# Altium PCB ESC10_REV2.PcbDoc
Units mil, origin at the board's own origin, x right, y up, seen from the top; angles counter-clockwise.
Board outline 3790.84 x 1700 mil, 2 copper layers (Top Layer, Bottom Layer); 138 components, 92 nets, 434 pads, 170 vias.
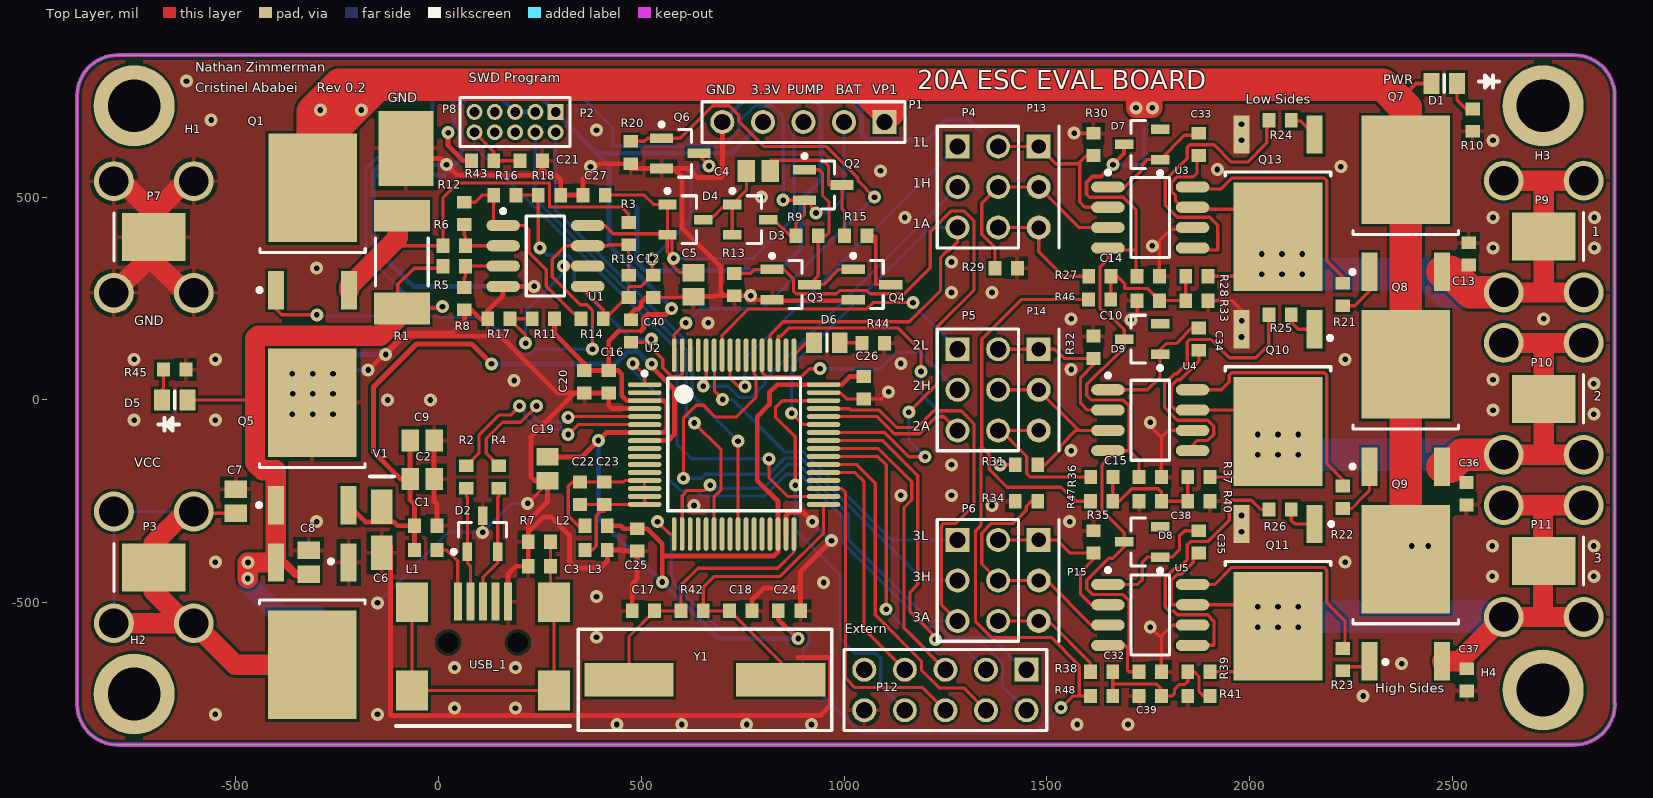
[diagram p0: Top Layer view]
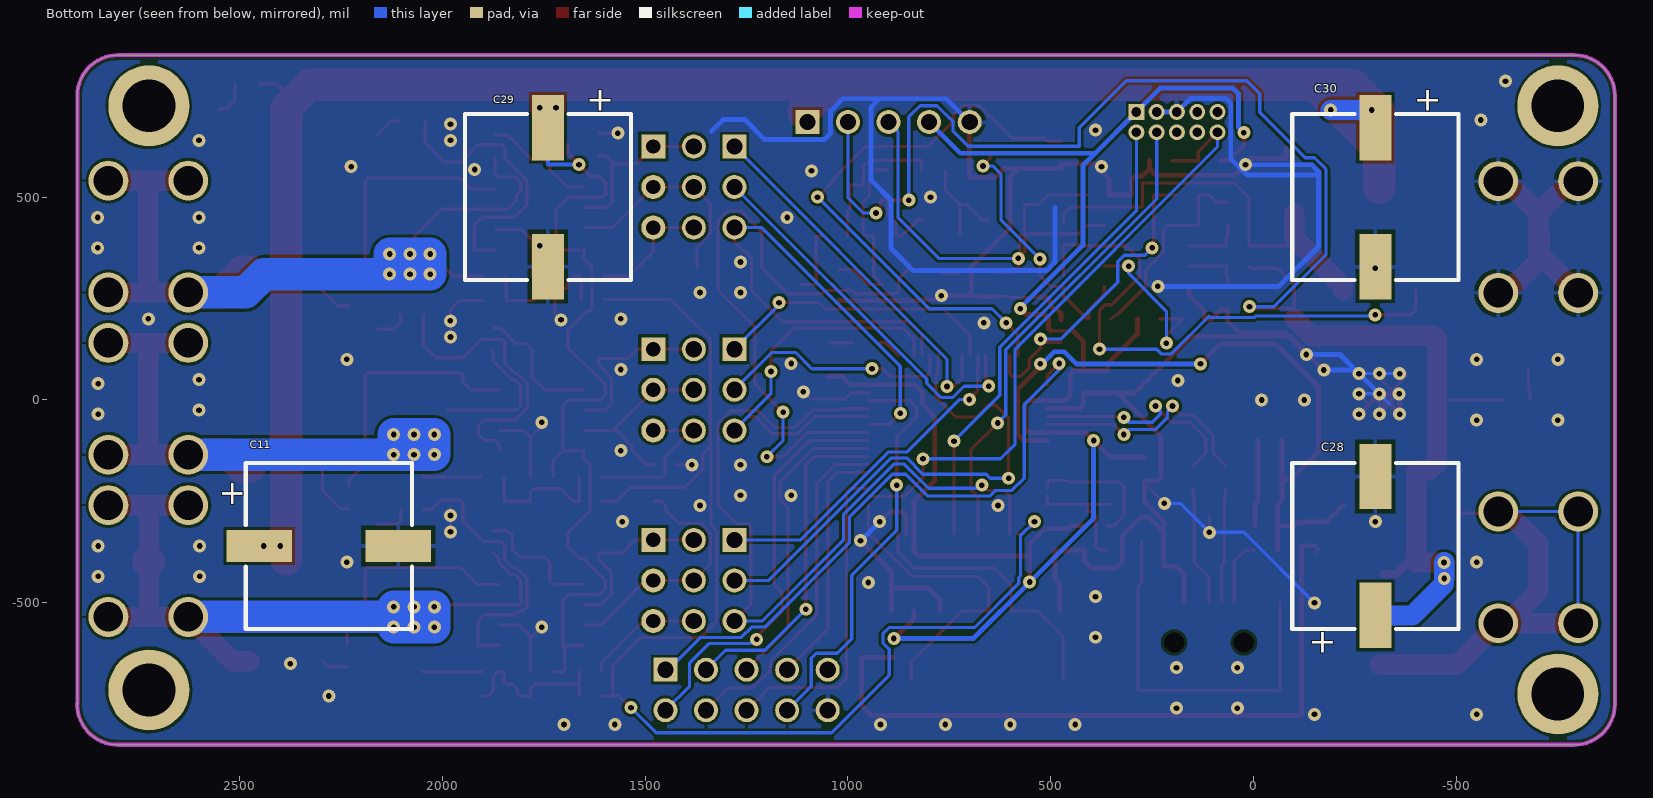
[diagram p1: Bottom Layer view, seen from below]

## Layer stack, top to bottom
Top Solder: solder mask 0.4, Solder Resist, Dk 3.5
Top Layer: signal copper 1.4
Dielectric1: dielectric 12.6, FR-4, Dk 4.8
Bottom Layer: signal copper 1.4
Bottom Solder: solder mask 0.4, Solder Resist, Dk 3.5

## Board outline
-790.5,-850 cw(c-790.5,-750) -890.5,-750 -890.5,750 cw(c-790.5,750) -790.5,850 2800.02,850 cw(c2800.02,750) 2900.02,750 2900,750 2900,-750 2900.34,-750 cw(c2800.34,-750) 2800.34,-850

## Design rules (kind name [scope] priority, off if disabled: settings)
AssemblyTestPointUsage [All] p1 off:
AssemblyTestpoint [All] p1 off: testpointundercomponent=TRUE minsize=40 maxsize=100 preferedsize=60 minholesize=0 maxholesize=40 preferedholesize=32 testpointgrid=1 usegrid=TRUE gridtolerance=0.01 allowsidetop=TRUE allowsidebottom=TRUE
Clearance [All] p1: gap=7
DiffPairsRouting [All] p1: maxlimit=200 minlimit=10 mostfreqgap=10 toplayer_minwidth=8 toplayer_maxwidth=15 toplayer_prefwidth=15 bottomlayer_minwidth=8 bottomlayer_maxwidth=15 bottomlayer_prefwidth=15 maxuncoupledlength=1000
FabricationTestPointUsage [All] p1 off: valid=0 allowmultiple=FALSE
FabricationTestpoint [All] p1 off: side=3 testpointundercomponent=TRUE minsize=40 maxsize=100 preferedsize=60 minholesize=0 maxholesize=40 preferedholesize=32 testpointgrid=1 allowsidetop=TRUE allowsidebottom=TRUE usegrid=TRUE gridtolerance=0.01
HoleSize [All] p1: absolutevalues=TRUE maxlimit=250 minlimit=1 maxpercent=80.000 minpercent=20.000
HoleToHoleClearance [All] p1: gap=12 allowstackedmicrovias=FALSE
MinimumSolderMaskSliver [All] p1: minsoldermaskwidth=6
PasteMaskExpansion [All] p1: expansion=-2
PlaneConnect [All] p1: planeconnectstyle=Relief reliefexpansion=20 reliefentries=4 reliefconductorwidth=20 reliefairgap=10
PolygonConnect PolygonConnect_1 [(InComponent('Q10') OR InComponent('Q11') OR InComponent('Q12')OR InComponent('Q13')OR InComponent('Q14')OR InComponent('Q15'))] p1: connectstyle=Direct reliefconductorwidth=10 reliefentries=4 polygonreliefangle="90 Angle" airgapwidth=10
PolygonConnect PolygonConnect_2 [(InPadClass('All Pads'))] p2: connectstyle=Relief reliefconductorwidth=10 reliefentries=4 polygonreliefangle="90 Angle" airgapwidth=10
PolygonConnect [All] p3: connectstyle=Direct reliefconductorwidth=10 reliefentries=4 polygonreliefangle="90 Angle" airgapwidth=10
RoutingVias [All] p1: holewidth=14 width=32 viastyle="Through Hole" minholewidth=14 minwidth=32 maxholewidth=14 maxwidth=32
SMDEntry [All] p1: side=TRUE corner=FALSE anyangle=FALSE
SilkToSilkClearance [All] p1: silktosilkclearance=4
SilkToSolderMaskClearance SilkscreenOverComponentPads [IsPad] p1: minsilkscreentomaskgap=4 clearancetoexposedcopper=TRUE
SolderMaskExpansion SolderMaskExpansion_1 [InComponent('U2')] p1: expansion=0
SolderMaskExpansion [All] p2: expansion=4
Width Width_3 [InNet('GND')] p1: maxlimit=80 minlimit=6 preferedwidth=12 minimp=50.000000 maximp=50.000000 favimp=50.000000
Width Width_2 [InNet('3.3V')] p2: maxlimit=40 minlimit=6 preferedwidth=12
Width Width_1 [InNet('5V')] p3: maxlimit=40 minlimit=6 preferedwidth=12
Width [All] p4: maxlimit=80 minlimit=8 preferedwidth=8 minimp=50.000000 maximp=50.000000 favimp=50.000000
18 further rules are at their usual default settings.

## Classes and differential pairs
differential pair USB_MCU: +USB_MCU_P -USB_MCU_N
differential pair U: +U_P -U_N

## Components (designator, comment, footprint, x,y, rotation, side; value= is the part's Value field where it differs from the comment)
C1 "0805" 1608[0603] -30.99,-310 r0 top
C2 "0805" C0805 -40,-195 r0 top
C3 "0805" 1608[0603] 249.01,-410 r180 top
C4 "0805" C0805 789.01,564.49 r0 top
C5 "0805" C0805 629.01,284.49 r270 top
C6 "Cap Pol1" 1206_C -140,-320 r270 top
C7 "Cap" C0805 -500,-250 r270 top
C8 "Cap" C0805 -320,-400 r270 top
C9 "Cap" C0805 -40,-100 r180 top
C10 "0805" 1608[0603] 1750,245 r0 top
C11 "Cap Pol1" EEE-FPV391UAP 2280,-360 r90 bottom
C12 "0805" 1608[0603] 530,280 r90 top
C13 "0805" 1608[0603] 2540,360 r270 top
C14 "0805" 1608[0603] 1750,305 r180 top
C15 "0805" 1608[0603] 1755,-190 r180 top
C16 "0805" 1608[0603] 420,45 r90 top
C17 "0805" 1608[0603] 505.55,-520 r0 top
C18 "0805" 1608[0603] 745.55,-520 r180 top
C19 "0805" C0805 269.01,-170 r270 top
C20 "0805" 1608[0603] 360,45 r270 top
C21 "0805" 1608[0603] 229.01,590 r180 top
C22 "0805" 1608[0603] 349.01,-230 r90 top
C23 "0805" 1608[0603] 409.01,-230 r90 top
C24 "0805" 1608[0603] 865.55,-520 r180 top
C25 "0805" 1608[0603] 490,-345 r90 top
C26 "0805" 1608[0603] 1049.01,30 r270 top
C27 "0805" 1608[0603] 384.01,505 r0 top
C28 "Cap Pol1" EEE-FPV391UAP -300,-360 r0 bottom
C29 "Cap Pol1" EEE-FPV391UAP 1740,500 r180 bottom
C30 "Cap Pol1" EEE-FPV391UAP -300,500 r180 bottom
C32 "0805" 1608[0603] 1755,-670 r180 top
C33 "0805" 1608[0603] 1875,630 r90 top
C34 "0805" 1608[0603] 1875,150 r90 top
C35 "0805" 1608[0603] 1875,-350 r90 top
C36 "0805" 1608[0603] 2534.61,-231.22 r90 top
C37 "0805" 1608[0603] 2535,-690 r90 top
C38 "0805" 1608[0603] 1755,-250 r0 top
C39 "0805" 1608[0603] 1755,-730 r0 top
C40 "0805" 1608[0603] 475,170 r270 top
D1 "LED3" 6-0805_L 2480,780 r0 top
D2 "Bat54A" SOT-23B_N 109.01,-330 r90 top
D3 "Bat54A" SOT-23B_N 769.01,444.49 r0 top
D4 "Bat54A" SOT-23B_N 609.01,444.49 r0 top
D5 "LED3" 6-0805_L -650,0 r180 top
D6 "LED3" 6-0805_L 958,141 r0 top
D7 "Bat54A" SOT-23B_N 1735,630 r180 top
D8 "Bat54A" SOT-23B_N 1735,-350 r180 top
D9 "Bat54A" SOT-23B_N 1735,150 r180 top
H1 "stand_off" 4-40_screw_hole#1 -750,750 r0 top
H2 "stand_off" 4-40_screw_hole#1 -750,-700 r0 top (schematic designator H1)
H3 "stand_off" 4-40_screw_hole#2 2723.42,725 r0 top
H4 "stand_off" 4-40_screw_hole#2 2723.42,-715 r0 top
L1 "FB" 1608[0603] -30.99,-370 r0 top
L2 "FB" 1608[0603] 389.01,-310 r0 top
L3 "FB" 1608[0603] 389.01,-370 r0 top
P1 "Header 5" HDR1X5 1100,685 r180 top
P2 "Header 5X2" MHDR2X5 289.01,710 r180 top
P3 "Header" 8191_K -800,-275 r0 top
P4 "Header 3X2" HDR2X3 1280,625 r270 top
P5 "Header 3X2" HDR2X3 1280,125 r270 top
P6 "Header 3X2" HDR2X3 1280,-345 r270 top
P7 "Header" 8191_K -800,539.37 r0 top
P8 "GND_CLIP" GND_CLIP -80,620 r270 top
P9 "Header" 8191_K 2823.42,265 r180 top
P10 "Header" 8191_K 2823.42,-135 r180 top
P11 "Header" 8191_K 2823.42,-535 r180 top
P12 "Header 5X2" HDR2X5 1450,-665 r180 top
P13 "Header 3" HDR1X3 1480,625 r270 top
P14 "Header 3" HDR1X3 1480,125 r270 top
P15 "Header 3" HDR1X3 1480,-345 r270 top
Q1 "PMOS-2" TO228P970-3_4AM -310,440 r90 top
Q2 "PMOS-2" SOT-23_M 949.01,530 r0 top
Q3 "2N7002P" SOT-23_M 869.01,284.49 r0 top
Q4 "2N7002P" SOT-23_M 1069.01,284.49 r0 top
Q5 "PMOS-2" TO228P970-3_4AM -310.99,-570 r270 top
Q6 "2N7002P" SOT-23_M 596.57,608 r0 top
Q7 "NMOS-2" TO228P970-3_4AM 2385,485 r90 top
Q8 "NMOS-2" TO228P970-3_4AM 2385,5 r90 top
Q9 "NMOS-2" TO228P970-3_4AM 2385,-475 r90 top
Q10 "NMOS-2" TO228P970-3_4AM 2070,5 r270 top
Q11 "NMOS-2" TO228P970-3_4AM 2070,-475 r270 top
Q13 "NMOS-2" TO228P970-3_4AM 2070,485 r270 top
R1 "Res1" RESC6432AM -90,340 r90 top
R2 "Res1" 1608[0603] 69.01,-190 r90 top
R3 "Res1" 1608[0603] 469.01,410 r270 top
R4 "Res1" 1608[0603] 149.01,-190 r90 top
R5 "Res1" 1608[0603] 39.01,330 r0 top
R6 "Res1" 1608[0603] 39.01,380 r180 top
R7 "Res1" 1608[0603] 249.01,-350 r0 top
R8 "Res1" 1608[0603] 64.01,250 r90 top
R9 "Res1" 1608[0603] 909.01,404.49 r0 top
R10 "Res1" 1608[0603] 2550,690 r270 top
R11 "Res1" 1608[0603] 259.01,200 r180 top
R12 "Res1" 1608[0603] 64.01,460 r270 top
R13 "Res1" 1608[0603] 729.01,284.49 r270 top
R14 "Res1" 1608[0603] 379.01,200 r0 top
R15 "Res1" 1608[0603] 1029.01,404.49 r0 top
R16 "Res1" 1608[0603] 164.01,505 r180 top
R17 "Res1" 1608[0603] 149.01,200 r180 top
R18 "Res1" 1608[0603] 274.01,505 r180 top
R19 "Res1" 1608[0603] 469.01,280 r90 top
R20 "Res1" 1608[0603] 474.57,610 r270 top
R21 "Res1" 1608[0603] 2230,260 r90 top
R22 "Res1" 1608[0603] 2230,-240 r90 top
R23 "Res1" 1608[0603] 2230,-640 r90 top
R24 "Res1" 1608[0603] 2075,690 r180 top
R25 "Res1" 1608[0603] 2075,210 r180 top
R26 "Res1" 1608[0603] 2075,-270 r180 top
R27 "Res1" 1608[0603] 1630.81,305 r180 top
R28 "Res1" 1608[0603] 1870,305 r180 top
R29 "Res1" 1608[0603] 1400,325 r0 top
R30 "Res1" 1608[0603] 1615,630 r90 top
R31 "Res1" 1608[0603] 1450,-160 r180 top
R32 "Res1" 1608[0603] 1615,130 r90 top
R33 "Res1" 1608[0603] 1870,245 r0 top
R34 "Res1" 1608[0603] 1450,-250 r180 top
R35 "Res1" 1608[0603] 1615,-350 r90 top
R36 "Res1" 1608[0603] 1635.81,-190 r180 top
R37 "Res1" 1608[0603] 1875,-190 r180 top
R38 "Res1" 1608[0603] 1635,-670 r180 top
R39 "Res1" 1608[0603] 1875,-670 r180 top
R40 "Res1" 1608[0603] 1875,-250 r0 top
R41 "Res1" 1608[0603] 1875,-730 r180 top
R42 "Res1" 1608[0603] 625.55,-520 r0 top
R43 "Res1" 1608[0603] 109.01,590 r180 top
R44 "Res1" 1608[0603] 1072,140 r0 top
R45 "Res1" 1608[0603] -650,75 r0 top
R46 "Res1" 1608[0603] 1630,247.78 r0 top
R47 "Res1" 1608[0603] 1635,-250 r0 top
R48 "Res1" 1608[0603] 1635,-730 r0 top
U1 "LM358" SOIC127P600-8BM 264.01,355 r0 top
U2 "MKL25Z64VLH4" TSQFP50P1200X1200-64M 729.01,-110 r0 top
U3 "ADP3110A" SOIC127P600-8BM 1755,450 r0 top
U4 "ADP3110A" SOIC127P600-8BM 1755,-50 r0 top
U5 "ADP3110A" SOIC127P600-8BM 1755,-530 r0 top
USB_1 "USB-M2xFxx" USB-M2xFxx 110,-450 r0 top
V1 "MC78M05 5V Reg" TO228P970-3_4AM -310.99,-90 r90 top
Y1 "8MHz" crystal 470,-690 r0 top

## Footprints (in the part's own frame and the unit in brackets; to place one, negate y for a bottom-side part, rotate by r counter-clockwise, add the part's x,y. Pads: shape width x height; smd on the part's side, far side on the other; paste and mask are expansions set on the pad)
4-40_screw_hole#1 [mil] "4-40_screw_hole"
  round 200 hole 130: 1(0,-25)
4-40_screw_hole#2 [mil] "4-40_screw_hole"
  round 200 hole 130: 1(0,0)
6-0805_L [mm] "Chip Resistor, Body 2.0x1.2mm, IPC High Density"
  rect 1x1.3 smd: 1(-0.8,0) 2(0.8,0)
  silkscreen extent 0,-0.55 0,0.55, body extent -1.07,-0.7 1.07,0.7, height 0.7
1206_C [mm] "1206_Cap"
  rect 2.15x1.35 smd: 1(-1.45,0) 2(1.45,0)
  silkscreen extent -3.33,-0.71 -3.33,0.76
1608[0603] [mm] "Chip Capacitor, Body 1.6x0.8mm, IPC High Density"
  rect 0.8x0.9 smd: 1(-0.7,0) 2(0.7,0)
  body extent -0.87,-0.48 0.87,0.48, height 1.3
8191_K [mm]
  round 2.5 hole 1.85: 1(0,-7) 1(0,0) 1(5,-7) 1(5,0)
  rect 4x3 smd: 1(2.5,-3.5)
  silkscreen extent 0,-5 0,-2
C0805 [mm] "Chip Capacitor, Body 2.0x1.3mm, IPC High Density"
  rect 1.1x1.4 smd: 1(-0.75,0) 2(0.75,0)
  body extent -1.1,-0.72 1.1,0.72, height 1.4
crystal [mil]
  rect 220x83 smd: 1(0,0) 2(374,0)
  silkscreen extent -125,-125 500,125, body extent -37,-95 413,95, height 20
EEE-FPV391UAP [mm]
  rect 2x4.1 smd: 1(0,4.35) 2(0,-4.35)
  silkscreen extent -5.2,-5.2 5.2,5.2
GND_CLIP [mil] "Ground clip for a probe"
  rect 185x135 smd: 1(0,0)
HDR1X3 [mm] "Connector; Header; 3 Position"
  rect 1.5x1.5 hole 0.9: 1(0,0)
  round 1.5 hole 0.9: 2(2.54,0) 3(5.08,0)
  silkscreen extent -1.27,1.27 6.35,1.27
HDR1X5 [mm] "Connector; Header; 5 Position"
  rect 1.5x1.5 hole 1.016: 1(0,0)
  round 1.5 hole 1.016: 2(2.54,0) 3(5.08,0) 4(7.62,0) 5(10.16,0)
  silkscreen extent -1.27,-1.27 11.43,1.27
HDR2X3 [mm] "Connector; Header; 3x2 Position"
  rect 1.5x1.5 hole 1.016: 1(0,0)
  round 1.5 hole 1.016: 2(0,2.54) 3(2.54,0) 4(2.54,2.54) 5(5.08,0) 6(5.08,2.54)
  silkscreen extent -1.27,-1.27 6.35,3.81
HDR2X5 [mm] "Connector; Header; 5x2 Position"
  rect 1.5x1.5 hole 1.016: 1(0,0)
  round 1.5 hole 1.016: 2(0,2.54) 3(2.54,0) 4(2.54,2.54) 5(5.08,0) 6(5.08,2.54) 7(7.62,0) 8(7.62,2.54) 9(10.16,0) 10(10.16,2.54)
  silkscreen extent -1.27,-1.27 11.43,3.81
MHDR2X5 [mm] "Connector; Header; 5x2 Position"
  rect 1x1 hole 0.6 mask+0.152: 1(0,0)
  round 1 hole 0.6 mask+0.152: 2(0,1.27) 3(1.27,0) 4(1.27,1.27) 5(2.54,0) 6(2.54,1.27) 7(3.81,0) 8(3.81,1.27) 9(5.08,0) 10(5.08,1.27)
  silkscreen extent -0.9,-0.9 5.98,2.17
RESC6432AM [mm] "Chip Resistor, Body 6.4x3.2mm, IPC Low Density"
  rect 2x3.5 smd: 1(-2.9,0) 2(2.9,0)
  silkscreen extent -1.5,-1.65 1.5,1.65, body extent -3.32,-1.73 3.32,1.73, height 1.1
SOIC127P600-8BM [mm] "SOIC, 8-Leads, Body 4.9x3.9mm, Pitch 1.27mm, IPC Low Density"
  oval 2.1x0.7 smd: 1(-2.65,1.905) 2(-2.65,0.635) 3(-2.65,-0.635) 4(-2.65,-1.905) 5(2.65,-1.905) 6(2.65,-0.635) 7(2.65,0.635) 8(2.65,1.905)
  silkscreen extent -2.77,-2.5 1.2,2.93, body extent -2,-2.5 2,2.5, height 2.59
SOT-23_M [mm] "SOT23, 3-Leads, Body 2.9x1.3mm, Pitch 0.95mm, Lead Span 2.5mm, IPC Low Density"
  rect 1.45x0.6 smd: 1(-1.175,0.95) 2(-1.175,-0.95) 3(1.175,0)
  silkscreen extent -1.3,-1.5 0.7,1.92, body extent -0.7,-1.5 0.7,1.5, height 1.1
SOT-23B_N [mm] "SOT23, 3-Leads, Body 2.9x1.3mm, Pitch 0.95mm, Lead Span 2.4mm, IPC Medium Density"
  rect 1.15x0.6 smd: 1(-1.125,0.95) 2(-1.125,-0.95) 3(1.125,0)
  silkscreen extent -1.25,-1.5 0.7,1.92, body extent -0.7,-1.5 0.7,1.5, height 1.14
TO228P970-3_4AM [mm] "D-PAK, 4-Leads, Body 6.1x6.5mm, Pitch 2.28mm, Lead Span 9.7mm, IPC Low Density"
  rect 2.4x1 smd: 1(-4.3,2.28) 3(-4.3,-2.28)
  rect 6.8x5.55 smd: 4(2.1,0)
  silkscreen extent -4.42,-3.3 -1.7,3.45, body extent -1.95,-3.3 4.25,3.3, height 2.4
TSQFP50P1200X1200-64M [mm] "Thin QFP, 64-Leads, Body 10x10mm, Pitch 0.5mm, IPC Low Density"
  oval 2.1x0.3 smd: 1(-5.6,3.75) 2(-5.6,3.25) 3(-5.6,2.75) 4(-5.6,2.25) 5(-5.6,1.75) 6(-5.6,1.25) 7(-5.6,0.75) 8(-5.6,0.25) 9(-5.6,-0.25) 10(-5.6,-0.75) 11(-5.6,-1.25) 12(-5.6,-1.75) 13(-5.6,-2.25) 14(-5.6,-2.75) 15(-5.6,-3.25) 16(-5.6,-3.75) 33(5.6,-3.75) 34(5.6,-3.25) 35(5.6,-2.75) 36(5.6,-2.25) 37(5.6,-1.75) 38(5.6,-1.25) 39(5.6,-0.75) 40(5.6,-0.25) 41(5.6,0.25) 42(5.6,0.75) 43(5.6,1.25) 44(5.6,1.75) 45(5.6,2.25) 46(5.6,2.75) 47(5.6,3.25) 48(5.6,3.75)
  oval 0.3x2.1 smd: 17(-3.75,-5.6) 18(-3.25,-5.6) 19(-2.75,-5.6) 20(-2.25,-5.6) 21(-1.75,-5.6) 22(-1.25,-5.6) 23(-0.75,-5.6) 24(-0.25,-5.6) 25(0.25,-5.6) 26(0.75,-5.6) 27(1.25,-5.6) 28(1.75,-5.6) 29(2.25,-5.6) 30(2.75,-5.6) 31(3.25,-5.6) 32(3.75,-5.6) 49(3.75,5.6) 50(3.25,5.6) 51(2.75,5.6) 52(2.25,5.6) 53(1.75,5.6) 54(1.25,5.6) 55(0.75,5.6) 56(0.25,5.6) 57(-0.25,5.6) 58(-0.75,5.6) 59(-1.25,5.6) 60(-1.75,5.6) 61(-2.25,5.6) 62(-2.75,5.6) 63(-3.25,5.6) 64(-3.75,5.6)
  silkscreen extent -5.72,-4.15 4.15,4.57, body extent -5,-5 5,5, height 1.6
USB-M2xFxx [mil] "USB Mini B connector SMD"
  rect 20x94 smd mask+6: 1(-62,-47) 2(-31,-47) 3(0,-47) 4(31,-47) 5(62,-47)
  rect 79x98 smd mask+6: 6(-175,-49) 7(-175,-266) 8(175,-266) 9(175,-49)
  round 0 hole 50 unplated mask+25: ""(-86,-148) ""(86,-148)
  silkscreen extent -215,-354 215,-354

## Part data
C1 C2 C3 C4 C5 C10 C12 C13 C14 C15 C16 C17 C18 C19 C20 C21 C22 C23 C24 C25 C26 C27 C32 C33 C34 C35 C36 C37 C38 C39 C40: library part "Cap Semi", "Capacitor (Semiconductor SIM Model)"
C6 C11 C28 C29 C30: "Polarized Capacitor (Radial)"
C7 C8 C9: "Capacitor"
D1 D5 D6: "Typical BLUE SiC LED"
D2 D3 D4 D7 D8 D9: library part Bat45C, "Bat45C"
L1 L2 L3: library part Inductor, "Inductor"
P1: "Header, 5-Pin"
P2 P12: "Header, 5-Pin, Dual row"
P3 P7 P9 P10 P11: library part Header1h1
P4 P5 P6: "Header, 3-Pin, Dual row"
P13 P14 P15: "Header, 3-Pin"
Q1 Q2 Q5: "P-Channel Power MOSFET"
Q7 Q8 Q9 Q10 Q11 Q13: "N-Channel Power MOSFET"
R1 R2 R3 R4 R5 R6 R7 R8 R9 R10 R11 R12 R13 R14 R15 R16 R17 R18 R19 R20 R21 R22 R23 R24 R25 R26 R27 R28 R29 R30 R31 R32 R33 R34 R35 R36 R37 R38 R39 R40 R41 R42 R43 R44 R45 R46 R47 R48: "Resistor"
U1: "LM358 Op Amp"
U2: "MKL25Z64VLH4 MCU"
USB_1: "USB Mini-B for USB-M2xFxx"
V1: library part MCP1702, "MCP1702 5V REG"
Y1: library part XTAL, "Crystal Oscillator"

## Via types
v1: diameter 32, hole 14, Top Layer to Bottom Layer, tented both sides, 137 vias
v2: diameter 32, hole 14, Top Layer to Bottom Layer, tented bottom, 27 vias
v3: diameter 32, hole 14, Top Layer to Bottom Layer, tented top, 4 vias
v4: diameter 32, hole 14, Top Layer to Bottom Layer, 2 vias

## Nets (pads, with @x,y where several pads share a name; then routed paths per layer and width w, separated by ;. In a path a pad name is that pad's centre, name@x,y a point inside that pad or via, vN(x,y) a via of type N, cw(c..) or ccw(c..) an arc to the next point about the centre after c; other vN are vias at no path point)
1A_EXTERN: U2.36
1H_EXTERN: P12.5 U2.40 | length 764.8
  Top Layer w8: U2.40 1085.06,-119.84 1167,-201.79 1167,-246.18 1148,-265.18 1148,-563 P12.5
1L_EXTERN: P12.3 U2.39 | length 826.7
  Top Layer w8: U2.39 1083.53,-139.53 1104,-160 v1(1104,-516)
  Bottom Layer w8: v1(1104,-516) 1205,-617 1302,-617 P12.3
2A_EXTERN: P12.7 U2.37 | length 614.6
  Top Layer w8: U2.37 1026.98,-178.9 1049,-200.91 1049,-564 P12.7
2H_EXTERN: P12.2 U2.41 | length 1036.2
  Top Layer w8: U2.41 1095.37,-100.16 1182,-186.79 1182,-454.82 1163,-473.82 1163,-522 1225,-584 v1(1225,-590)
  Bottom Layer w8: v1(1225,-590) 1231,-590 1241.53,-600.53 1342.84,-600.53 1390.53,-648.21 1390.53,-705.53 P12.2
2L_EXTERN: P12.9
3.3V: C16.2 C19.1 C20.1 C24.2 C25.2 C26.1 L2.2 P1.4 P2.1 R11.1 R43.2 U2.3 U2.7 U2.30 U2.48 | length 4742.9
  Top Layer w8: 445,170 499.29,170
  Top Layer w12: v1(24,659) 24,627 61,590 R43.2 ; C19.1 354,-140.47 v1(394.47,-100) 414,-80.47 U2.7 555,-80.47 563,-72.47 563,-9.73 555,-1.73 U2.3 464.73,-1.73 452,11 452,63.56 443,72.56 C16.2 ; R11.1 286.57,163 360,89.57 C20.1 C16.2 ; L2.2 449,-310 456.44,-317.44 C25.2 515,-317.44 552,-354.44 552,-385 ; 445,170 420,145 C16.2 ; 499.29,170 505.72,176.43 505.72,200.72 516,211 561,211 v1@569,219 ; v1(552,-449) 552,-385 ; v1(575,225) v1@579,225 ; C24.2 837.99,-541.98 ; v1(887,-588) 851.85,-554.99 ; C26.1 1013.99,57.56 994.07,37.64 U2.48 835,37.64 816,18.64 816,-11 786,-41 786,-198.72 837.28,-250 U2.30 837.28,-374.72 827,-385 552,-385 ; 837.99,-541.98 851.85,-554.99 ; 837.99,-541.98 851,-554.99 851.85,-554.99
  Bottom Layer w12: v1(24,659) 37.33,672.33 37.33,755.1 51,768.77 230.24,768.77 P2.1 390.76,608.26 ; v1(394.47,-100) 394.47,-291.47 v1(552,-449) 691,-588 v1(887,-588) ; v1(575,225) 575,227.13 421,381.13 421,578.01 390.76,608.26 ; P1.4 723.26,608.26 390.76,608.26
3A_EXTERN: P12.4 U2.38 | length 854.7
  Top Layer w8: U2.38 1031.21,-159.21 1077,-205 1077,-530 1191,-644 1191,-666 1235,-710 1295,-710 P12.4
3H_EXTERN: P12.8 U2.46 | length 1034
  Top Layer w8: v1(880,-210) 880,-91 831,-42 831,-19 848.27,-1.73 U2.46
  Bottom Layer w8: v1(880,-210) 880,-321.5 991,-432.5 991,-589 1026.47,-624.47 1078,-624.47 1090.53,-637 1090.53,-705.53 P12.8
3L_EXTERN: P12.6 U2.35 | length 795.7
  Top Layer w8: U2.35 995,-218.27 1004,-227.27 1004,-686 1027,-709 1194,-709 P12.6
5V: C1.1 C2.1 C6.1 C9.2 L1.1 U2.8 V1.3 | length 1788
  Top Layer w12: V1.3 -180.04,-300.47 -110,-300.47 -100.47,-310 C1.1 ; C9.2 C2.1 ; L1.1 C1.1 ; v1(131,89) 82,138 -54,138 -160,32 -160,-128 -93,-195 C2.1 ; U2.8 566.03,-100.16 582,-84.19 582,26.35 526,82.35 v1(526,89) ; C2.1 -69.53,-247.02 -58.54,-258 C1.1
  Bottom Layer w12: v1(131,89) 436.8,89 466.8,119 491.56,119 521.56,89 v1(526,89)
A_BLMA: P4.5 U2.43 U2.52 | length 1446.6
  Top Layer w8: U2.52 817.6,159.91 850.27,192.59 1160.77,192.59 1238,269.82 1238,351.18 1253.82,367 1257,367 1280,390 P4.5 ; v1(871,-32.79) 899,-60.79 U2.43
  Bottom Layer w8: v1(871,-32.79) 871,83.38 1212.62,425 P4.5
A_BLMA_1: P4.6 P13.3 R27.2 | length 308.1
  Top Layer w8: P4.6 P13.3 1480,365 1540,305 R27.2
A_BLMH: P4.3 U2.60 | length 938.9
  Top Layer w8: v1(653,34) 660.12,41.12 U2.60
  Bottom Layer w8: v1(653,34) 714,34 742,6 771,6 806,41 806,51 P4.3
A_BLMH_1: P4.4 P13.2 R29.1 U3.3 | length 542.5
  Top Layer w8: R29.1 1372.44,375.25 1339.47,408.21 1339.47,484.47 P4.4 P13.2 1580,425 U3.3
A_BLML: P4.1 U2.57 | length 911.1
  Top Layer w8: U2.57 719.17,53.83 740,33 v1(756,33)
  Bottom Layer w8: v1(756,33) 756,101 P4.1
A_BLML_1: P4.2 P13.1 R30.1 U3.2 | length 434.1
  Top Layer w8: P4.2 P13.1 1522.56,582.44 1577.28,582.44 1581,586.16 ; R30.1 1597.28,602.44 1581,586.16 ; U3.2 1594,475 1581,488 1581,586.16
A_FB: C10.2 R27.1 R28.2 R33.1 R46.2 | length 333.6
  Top Layer w8: R46.2 1657.56,265.49 1657.56,305 1673.31,305 1692,286.31 1692,275 1747.56,275 C10.2 R33.1 R28.2
A_PUMP: C33.2 D7.1 U3.1 | length 279.2
  Top Layer w8: U3.1 1692.01,525 1735,567.99 1735,580 1747.6,592.6 D7.1 1839.25,652.56 C33.2@1870,652.56
B_BLMA: P5.5 U2.44 U2.51 | length 1043.2
  Top Layer w8: U2.51 837.28,157.28 844.43,157.28 864.74,177.59 1132.41,177.59 1190,120 v1(1190,70) ; U2.44 1082.32,-41.1 1124.4,-83.18 1186.21,-83.18 1227.92,-41.47 1246.47,-41.47 P5.5
  Bottom Layer w8: v1(1190,70) 1190,15 P5.5
B_BLMA_1: P5.6 P14.3 R36.2 | length 394.6
  Top Layer w8: P5.6 P5.6@1386.46,-75 ; P14.3 P5.6@1386.46,-75 ; R36.2 1458.54,-190 1450.81,-182.27 1450.81,-139.35 P5.6@1386.46,-75
B_BLMH: P5.3 U2.53 | length 591.8
  Top Layer w8: U2.53 797.91,67 806.91,58 896,58 915,77 v1(941,77)
  Bottom Layer w8: v1(941,77) 1088.82,77 1128.82,117 1188,117 P5.3
B_BLMH_1: P5.4 P14.2 R31.1 U4.3 | length 454.5
  Top Layer w8: P5.4 P14.2 1480,23.31 1578.31,-75 ; R31.1 1496.21,-160 1533,-123.21 1533,-113.82 1571.82,-75 U4.3
B_BLML: P5.1 U2.58 | length 713.7
  Top Layer w8: U2.58 699.49,159.91 763.85,224.27 1055.85,224.27 1071.58,240 v1(1170,240)
  Bottom Layer w8: v1(1170,240) 1170,235 P5.1
B_BLML_1: P5.2 P14.1 R32.1 U4.2 | length 442.5
  Top Layer w8: P5.2 P14.1 1520,125 1542.56,102.44 R32.1 1615,86.69 1583.33,55.02 1583.33,-8.33 1600,-25 U4.2
B_FB: C38.2 R36.1 R37.2 R40.1 R47.2 | length 344.7
  Top Layer w8: R36.1@1662.56,-190 R47.2 1678.31,-250 1709.59,-218.72 1775,-218.72 1782.56,-226.27 C38.2 R40.1 R37.2
B_PUMP: C34.2 D9.1 U4.1 | length 327.4
  Top Layer w8: U4.1 1748,25 1779.29,56.29 D9.1 1779.29,124.41 1793.88,139 1818.72,139 1857.28,177.56 C34.2
C_BLMA: P6.5 U2.18 U2.45 | length 2012.1
  Top Layer w8: U2.18 601.06,-235.75 613.82,-223 657,-223 v1(670,-210) ; U2.45 1014,-21.42 1017.58,-25 1087.43,-25 1130.61,-68.18 1180,-68.18 ; 1188.18,-60 1180,-68.18 ; P6.5 1239.47,-504.47 1239.47,-310.92 1245.92,-304.47 1276.06,-304.47 1320.53,-260 1320.53,-58.21 1288.79,-26.47 1221.71,-26.47 1180,-68.18
  Bottom Layer w8: v1(670,-210) 662.2,-217.8 801.6,-217.8 861.4,-158 887.4,-158 1011,-281.6 1011,-344.18 1211.82,-545 P6.5
C_BLMA_1: P6.6 P15.3 R38.2 | length 292.4
  Top Layer w8: P6.6 P15.3 1505,-545 1607.44,-647.44 R38.2
C_BLMH: P6.3 U2.54 | length 1300.2
  Top Layer w8: v1(604,-193) 604,-45 636,-13 654,-13 683,-42 734.65,-42 783,6.35 783,60 778.23,64.77 U2.54
  Bottom Layer w8: v1(604,-193) 648.82,-193 658.82,-183 815.18,-183 855.18,-143 893.61,-143 1195.61,-445 P6.3
C_BLMH_1: P6.4 P15.2 R34.1 U5.3 | length 625.9
  Top Layer w8: R34.1 1461.81,-250 1449.19,-262.62 1449.19,-272.27 1416.99,-304.47 1363.21,-304.47 1339.47,-328.21 1339.47,-404.47 P6.4 P15.2 1499.33,-445 1609.33,-555 U5.3
C_BLML: P6.1 U2.59 | length 842.4
  Top Layer w8: U2.59 U2.59@679.8,79.1 ; v1(701,1) 680.96,21.04 U2.59@680.96,79.1 ; U2.59@679.8,79.1 U2.59@680.96,79.1 ; U2.59@679.8,79.1 U2.59@680.96,79.1
  Bottom Layer w8: v1(701,1) 725.21,1 854.21,-128 899.82,-128 1116.82,-345 P6.1
C_BLML_1: P6.2 P15.1 R35.1 U5.2 | length 441.2
  Top Layer w8: P6.2 P15.1 1525,-345 1557.56,-377.56 R35.1 1615,-393.31 1583.33,-424.98 1583.33,-479 1609.33,-505 U5.2
C_FB: C39.2 R38.1 R39.2 R41.1 R48.2 | length 413.8
  Top Layer w8: R48.2 R38.1 ; 1662.56,-700 1770.27,-700 1782.56,-712.28 C39.2 1808,-730 1815,-723 1815,-713.42 1827.14,-701.28 1840.72,-701.28 1847.44,-694.56 R39.2 1863.19,-670 1875,-681.81 1875,-718.19 1886.81,-730 R41.1
CMP_OUT: P12.1 U2.1 | length 1550.9
  Top Layer w8: v1(479.55,90) 508.54,61.01 U2.1
  Bottom Layer w8: v1(479.55,90) 471.41,81.86 565.63,-12.36 565.63,-192.81 595.82,-223 636.18,-223 650.18,-237 803.61,-237 857.61,-183 891.18,-183 996,-287.82 996,-350.4 1205.6,-560 1237.69,-560 1263.21,-585.53 1363.21,-585.53 1442.69,-665 P12.1
ESC_I_FB: C40.2 R16.1 R18.2 U2.63 | length 825.4
  Top Layer w8: R16.1 R18.2 246.45,378.55 v1(250,375) ; C40.2 517.44,142.44 v1(525,150) 525,128.18 553,100.18 553,79.39 574.26,58.13 594.75,58.13 601.06,64.45 U2.63
  Bottom Layer w8: v1(250,375) 268,357 319.18,357 335,341.18 335,290 475,150 v1(525,150)
EXTAL+: C17.2 R42.1 U2.32 Y1.1 | length 681.1
  Top Layer w8: Y1.1 470,-583.11 C17.2 R42.1 597.99,-457.01 640,-415 836.5,-415 876.65,-374.84 U2.32
EXTAL-: C18.2 R42.2 U2.33 Y1.2 | length 767.6
  Top Layer w8: Y1.2 844,-646.01 C18.2 R42.2 653.11,-461.89 680,-435 842.78,-435 949.49,-328.29 U2.33
GND: C1.2 C2.2 C3.2 C5.2 C6.2 C7.1 C8.1 C9.1 C10.1 C11.2 C12.1 C13.1 C14.1 C15.1 C16.1 C17.1 C18.1 C19.2 C20.2 C21.1 C24.1 C25.1 C26.2 C27.1 C28.2 C29.2 C30.2 C32.1 C36.1 C37.1 C38.1 C39.1 C40.1 D2.3 L3.2 P1.5 P2.3 P2.5 P7.1 P8.1 P12.10 Q3.2 Q4.2 Q5.1 Q6.2 Q10.3 Q11.3 Q13.3 R7.1 R8.1 R10.2 R13.2 R17.2 R18.1 R20.2 R29.2 R30.2 R31.2 R32.2 R33.2 R34.2 R35.2 R40.2 R41.2 R44.2 R45.2 U1.4 U2.4 U2.31 U2.47 U3.6 U4.6 U5.6 USB_1.5 V1.4 | length 13998.5
  Top Layer w8: v2(-360,65) -376.69,65 -380,61.69 -371.65,53.35 -346.03,27.72 V1.4@-341.65,23.35 ; v2(-358.75,15) -350,15 V1.4@-341.65,23.35 ; v2(-310,15) -330,15 V1.4@-331.65,13.35 ; v2(-310,65) -310,55 V1.4@-341.65,23.35 ; v2(-260,15) -260,13.66 -283.66,-10 -298.66,5 -299.33,4.33 V1.4 -310.99,-24.01 V1.4@-320,-15 ; C6.2@-150.99,-359.53 -160,-368.54 C6.2@-150,-378.54 ; v1(109.01,-326.33) D2.3 ; v1(220,-255) 269.01,-205.99 C19.2 ; C12.1 C12.1@547.72,252.44 ; 548,252.72 C12.1@547.72,252.44 ; C5.2 601.45,254.96 598.93,252.44 C12.1@547.72,252.44 ; U2.47 990.82,17.95 1006.34,2.44 C26.2 1092.44,2.44 v1(1110,20) ; v1(1385,-160) R31.2 ; v1(1567.56,657.56) R30.2 ; v1(1707.44,197.44) 1722.44,212.44 C10.1 ; v1(1755,-560) 1777.44,-582.44 1782.56,-582.44 ; v1(1755,-55) 1755,-64.88 1782.56,-92.44 ; C14.1 1777.56,392.56 1805,420 U3.6@1869.33,420 ; C32.1 1782.56,-582.44 ; C15.1 1782.56,-92.44 ; U5.6 1810,-555 1782.56,-582.44 ; U4.6 1800,-75 1782.56,-92.44 ; R33.2 1956.77,245 1980.24,221.53 Q10.3 ; Q11.3@1980.24,-310.71 Q11.3@1980.24,-263.47 ; V1.4@-341.65,23.35 V1.4@-331.65,13.35 ; V1.4@-331.65,13.35 -321.65,3.35 -320,1.69 V1.4@-320,-15 ; V1.4@-331.65,13.35 -340,5 V1.4@-320,-15
  Top Layer w12: P7.1@-823.43,276.58 P7.1@-773.44,226.59 ; P7.1@-725,375 P7.1@-725,414.37 ; P7.1@-626.58,512.79 -626.58,535.63 P7.1@-626.58,552.17 ; v2(-360,-35) -360,13.75 v2(-358.75,15) V1.4@-334.37,-9.37 ; V1.4@-351,-26 V1.4@-334.37,-9.37 ; V1.4@-350,15 V1.4@-330,15 ; v2(-310,-35) V1.4@-310,-33.75 ; v2(-260,-35) -299.33,4.33 v2(-310,15) ; v2(-260,65) v2(-310,15) ; v1@-182,65 -90,157 -85,157 ; C6.2@-150.99,-359.53 -118,-359.53 -118,-778 941,-778 967,-752 967,-635 886,-635 ; v1(-130,112) -85,157 ; P8.1 -80,595 5,595 v1(20,580) 46,554 240.57,554 256.57,570 ; C9.1 C2.2 -10.47,-249.95 -3.43,-257 C1.2 ; USB_1.5 172,-429 191,-410 C3.2 221.45,-381 R7.1 221.46,-326.54 ; v1(236,280) U1.4 159.68,258.23 121.45,220 R17.2 103.44,200 81,222.44 R8.1 64.01,194.51 35,165.5 -76.5,165.5 -85,157 ; C21.1 256.57,570 ; C19.2@269.01,-205.99 269.01,-251.44 221.46,-299 221.46,-326.54 ; C19.2 238.53,-199.53 228,-189 228,-91 336.44,17.44 ; C40.1 475,213.31 485.39,223.69 492.12,223.69 500,231.58 500,240.16 512.28,252.44 C12.1 ; C17.1 477.99,-453 490,-440.99 C25.1 454.56,-372.56 452,-370 L3.2 416.57,-397 399.57,-414 339,-414 323,-398 323,-334 278,-289 259,-289 221.46,-326.54 ; U2.4 428.42,-21.42 420,-13 C16.1 389,17.44 C20.2 336.44,17.44 ; C5.2 678,254.96 679.97,256.93 706.14,256.93 ; P1.5 700,551.98 696.02,548 638.02,548 615.42,570.6 579,570.6 ; C18.1@773.11,-522.11 C18.1 773.11,-493 802.11,-464 885.64,-464 893.11,-456.52 ; U2.31 856.97,-285 865.97,-276 898,-276 v1(922,-300) ; C24.1 893.11,-456.52 ; v1(969,-347) 893.11,-422.89 893.11,-456.52 ; Q4.2 1020.34,244.68 825.16,244.68 Q3.2 779.84,247.09 v1(770,256.93) R13.2 706.14,256.93 ; V1.4@-334.37,-9.37 V1.4@-310,-33.75 ; V1.4@-334.37,-9.37 -321.65,3.35 v2(-310,15) ; V1.4@-334.37,-9.37 -323.71,-20.04 V1.4@-310,-33.75 ; -85,157 153.44,157 293,17.44 336.44,17.44 ; 256.57,570 274.22,552.36 291.45,552.36 301.57,542.23 R18.1 C27.1 356.46,544.57 394.32,582.44 R20.2 474.57,570.6 Q6.2 579,570.6 ; 579,570.6 601,548.6 601,423 696.07,327.93 696.07,267 706.14,256.93
  Top Layer w50: P7.1@-800,263.78 -721.26,342.52 P7.1@-701.57,342.52 ; P7.1@-800,539.37 -780.31,539.37 -701.57,460.63 ; P7.1@-603.15,263.78 -622.84,263.78 P7.1@-701.57,342.52 ; P7.1@-603.15,539.37 -622.83,539.37 -626.58,535.63 -701.57,460.63 ; P7.1@-701.57,342.52 -701.57,401.57 -701.57,460.63
  Bottom Layer w8: v2(-360,65) v2(-310,65) v2(-260,65) ; -335,-10 v2(-310,15) v2(-260,15) ; v1(-150,-500) 23.67,-326.33 v1(109.01,-326.33) 180.35,-255 v1(220,-255) ; v1@1565,655 v1(1567.56,657.56)
  Bottom Layer w12: v2(-310,15) v2(-260,65) ; v1(-173,74) -251,74 v2(-260,65) ; v1(-130,112) -213,112 v2(-260,65) ; v1(20,580) -143,580 -160,563 -160,555 ; v1(236,280) -62,280 -160,378 -160,555 ; P2.3 P2.5 156.01,743 68,743 56.33,731.33 56.33,595 16.33,555 -160,555 ; 490,474.84 490,339 510,319 839,319 894,374 894,493 943,542 943,723 923.47,742.53 ; P1.5 757.53,742.53 923.47,742.53 ; v1(922,-300) v1(969,-347) ; 1337,662 1308,691 1254,691 1205,642 1059,642 1043,658 1043,712 1012.47,742.53 923.47,742.53
  other v1: 440,-800 600,-800 760,-800 920,-800 1575,-800 1700,-800 -550,-775 -150,-775 40,-760 190,-760 2280,-730 40,-660 190,-660 2375,-650 390,-585 390,-485 950,-450 2598.42,-435 2848.42,-435 -550,-400 2235.39,-400 2598.42,-360 2848.42,-360 1980,-325 -300,-300 1556.3,-300 1980,-285 630,-260 1365,-260 1140,-235 1265,-235 1265,-160 1560,-125 -750,-50 -550,-50 2848.42,-35 2600,-25 -125,0 -20,0 2848.42,40 187,48 2600,50 1560,75 1140,90 -750,100 -550,100 2235.39,100 1980,155 665,190 1980.24,195 1560,200 2725,200 1265,265 1365,265 1265,340 2600,375 2850,375 1150,450 2600,450 2850,450 796.57,500 1090,565 1920.35,568.11 375,575 2225,575 1980,640 2600,640 390,665 1980,680 -560,690 -621,786
  other v3: -300,325 1760,380
KL25_SWD_CLK: P2.4 U2.22 | length 1187.3
  Top Layer w8: v1(631,-57) 697,-123 697,-221.18 679.8,-238.38 U2.22
  Bottom Layer w8: P2.4 239.01,495.38 610.8,123.59 610.8,-36.8 v1(631,-57)
LED: D6.1 U2.49 | length 62.5
  Top Layer w8: U2.49 907.18,141 D6.1
MC_PUMP: Q3.1 R13.1 U2.42 | length 1731
  Top Layer w8: R13.1 770,312.05 779.84,321.89 Q3.1 851.3,321.89 875.73,297.46 875.73,268.12 882.17,261.68 981.43,261.68 989.65,269.9 1055.85,269.9 1064.07,261.68 1148.37,261.68 1212.62,325.92 1212.62,414.93 1263.21,465.53 1296.79,465.53 1320.53,441.79 1320.53,270.53 1230,180 1230,40 v1(1160,-30) ; U2.42 1100.47,-80.47 1160,-140 v1(1200,-140)
  Bottom Layer w8: v1(1160,-30) 1160,-100 v1(1200,-140)
NC1_ST: H1.1
NC2_ST: H2.1
NC3_ST: H3.1
NC4_ST: H4.1
NetC3_1: C3.1 R7.2 USB_1.6 USB_1.7 USB_1.8 USB_1.9 | length 936.5
  Top Layer w8: USB_1.6 USB_1.7 USB_1.8 USB_1.9 285,-459 276.57,-450.57 C3.1 R7.2
NetC4_1: C4.1 D3.1 D3.2 D4.3 | length 258.7
  Top Layer w8: D4.3 670,444.49 707.4,481.89 D3.1 ; D3.2 D3.1 ; C4.1 759.49,516.65 D3.1
NetC4_2: C4.2 Q2.3 R15.1 | length 512
  Top Layer w8: C4.2 C4.2@818.54,591 ; R15.1 1001.46,464 995.27,470.18 Q2.3 962,530 962,576 947,591 ; C4.2@818.54,591 947,591 ; C4.2@818.54,591 947,591
NetC12_2: C12.2 Q6.3 R14.2 R19.1 U1.5 | length 678
  Top Layer w8: U1.5 368.34,260.51 406.57,222.28 R14.2 411,200 463.44,252.44 R19.1 469.01,280 500,280 527,307 v1(527,348) ; Q6.3 Q6.3@650,608 ; v1(667,577) 650,594 ; 650,594 Q6.3@650,608 ; 650,594 Q6.3@650,608
  Bottom Layer w8: v1(527,348) 623,444 623,557 643,577 v1(667,577)
NetC22_1: C22.1 C23.1 L3.1 U2.15 U2.16 | length 337.5
  Top Layer w8: C22.1 C23.1 ; L3.1 379,-370 389,-360 389,-285 399,-275 ; U2.15 U2.16 458.08,-257.64 458,-257.56 C23.1 ; 399,-275 409.01,-275 ; 399,-275 409.01,-275 ; 409.01,-275 C23.1
NetC22_2: C22.2 C23.2 L2.1 U2.13 U2.14 | length 358.2
  Top Layer w8: L2.1 345,-310 320,-285 320,-213 330.56,-202.44 C22.2 C23.2 456,-202.44 459.86,-198.58 U2.13@508,-198.58 ; U2.14 U2.14@508,-218.27 ; U2.13 U2.13@508,-198.58 ; U2.14@508,-218.27 U2.13@508,-198.58 ; U2.14@508,-218.27 U2.13@508,-198.58
NetC35_2: C35.2 D8.1 U5.1 | length 324.6
  Top Layer w8: U5.1 1723.5,-455 1735,-443.5 1735,-400 1747.6,-387.4 D8.1 1808.6,-387.4 1827,-369 1827,-335 1839.56,-322.44 C35.2
NetD1_2: D1.2 R10.1 | length 88.8
  Top Layer w8: D1.2 2511.5,738.35 2532.28,717.56 R10.1
NetD5_2: D5.2 R45.1 | length 76.6
  Top Layer w8: D5.2 -681.5,25.59 -677.56,29.53 R45.1
NetD6_2: D6.2 R44.1 | length 55.4
  Top Layer w8: D6.2 1043.44,141 R44.1
NetL1_2: L1.2 USB_1.1 | length 162.6
  Top Layer w8: L1.2 21,-370 48,-397 USB_1.1
NetQ1_1: Q1.1 R3.2 R19.2 U1.7 | length 1430.2
  Top Layer w8: Q1.1 -399.76,223.76 -386,210 v1(-299.78,210) ; v1(379.83,125.17) 379.83,220.65 365.48,235 350,235 281,304 281,347 314,380 U1.7 417,380 419.44,382.44 R3.2 R19.2
  Bottom Layer w8: v1(-299.78,210) -296.78,207 -5.18,207 -1.18,203 105.82,203 109.82,207 203.82,113 226.18,113 238.36,125.17 v1(379.83,125.17)
NetQ1_3: Q1.3 R1.2 R3.1 R6.2 | length 1119.4
  Top Layer w8: -106.53,393.47 -93.07,380 R6.2 11.45,499 47.45,535 274,535 274,476 451,476 469.01,457.99 R3.1 ; R1.2 R1.2@-100,454.17 ; R1.2@-100,454.17 -100,459.17 R1.2@-100,454.17
  Top Layer w50: Q1.3 -220.24,279.76 -106.53,393.47 -100,400 ; -100,400 R1.2@-100,454.17 ; -100,400 R1.2@-100,454.17 ; R1.2@-100,454.17 -100,459.17 R1.2@-100,454.17
NetQ2_1: Q2.1 Q3.3 Q4.1 R9.2 | length 482.6
  Top Layer w8: Q2.1 939,567.4 947,559.4 947,504 963,488 963,412.49 955,404.49 R9.2 936.57,305.79 Q3.3 950,284.49 987.4,321.89 Q4.1
NetQ4_3: Q4.3 R15.2 | length 178.7
  Top Layer w8: R15.2 1078,404.49 1078,284.49 Q4.3
NetQ7_1: Q7.1 R21.1 | length 146.2
  Top Layer w8: R21.1 2259.21,232.44 2295.24,268.46 Q7.1 Q7.1@2281.97,302.44
NetQ8_1: Q8.1 R22.1 | length 143.4
  Top Layer w8: R22.1 2252.44,-267.56 2264.75,-255.25 2264.75,-253.91 2295.24,-223.42 Q8.1
NetQ9_1: Q9.1 R23.1 | length 65.7
  Top Layer w8: R23.1@2235,-657.56 2281.97,-657.56 Q9.1
NetQ10_1: Q10.1 R25.1 | length 82.9
  Top Layer w8: R25.1 2102.56,191.36 2119.63,174.29 Q10.1
NetQ11_1: Q11.1 R26.1 | length 88.1
  Top Layer w8: R26.1 2102.56,-297.56 2110.71,-305.71 Q11.1
NetQ13_1: Q13.1 R24.1 | length 68.5
  Top Layer w8: R24.1@2105,687.56 2126.5,687.56 Q13.1
NetR5_2: R5.2 R8.2 U1.3 | length 146.6
  Top Layer w8: R8.2 64.01,302 66.57,304.56 R5.2 U1.3
NetR6_1: R6.1 R12.2 U1.2 | length 146.6
  Top Layer w8: R12.2 64.01,406.56 66.57,404 R6.1 U1.2
NetR11_2: R11.2 R17.1 U1.6 | length 419.7
  Top Layer w8: v1(215,140) 215,159 176.57,197.43 R17.1 R11.2 ; v1(308,330) U1.6
  Bottom Layer w8: v1(215,140) 215,219 308,312 v1(308,330)
NetR12_1: R12.1 R14.1 R16.2 U1.1 | length 572.8
  Top Layer w8: R12.1 91,487.56 108.44,505 R16.2 136.45,482.45 136,482 ; R14.1 331,214.79 266,279.79 266,320.82 223,363.82 223,419.39 212.39,430 U1.1 U1.1@136,430 ; U1.1@136,430 136,482 ; U1.1@136,430 136,482
NetR21_2: R21.2 U3.8 | length 604.5
  Top Layer w8: U3.8@1869.33,520 1929.01,520 1956.19,547.18 2183.81,547.18 2190.25,540.74 2190.25,343.06 2230,303.31 R21.2
NetR22_2: R22.2 U4.8 | length 650.1
  Top Layer w8: U4.8 1930,25 1949.75,44.75 1949.75,60.74 1956.19,67.18 2183.81,67.18 2190.25,60.74 2190.25,-156.94 2230,-196.69 R22.2
NetR23_2: R23.2 U5.8 | length 552.8
  Top Layer w8: U5.8 1914.01,-455 1956.19,-412.82 2183.81,-412.82 2190.25,-419.26 2190.25,-499.86 2235,-544.61 R23.2@2235,-602.44
NetR24_2: R24.2 U3.5 | length 715.4
  Top Layer w8: U3.5@1869.33,370 1921.67,370 1921.67,430.26 1901.71,450.22 1821.51,450.22 1791.99,479.74 1791.99,541.48 1846.28,595.77 1846.28,622.75 1852.73,629.19 1912.38,629.19 1955,586.57 1995,586.57 2042.44,634.01 R24.2@2042.44,685
NetR25_2: R25.2 U4.5 | length 735.4
  Top Layer w8: U4.5 1859.33,-111.22 1870.77,-99.78 1897.15,-99.78 1911.67,-85.26 1911.67,-64.74 1897.15,-50.22 1821.95,-50.22 1790,-18.27 1790,39.49 1815.29,64.78 1820.78,64.78 1846.28,90.28 1846.28,142.75 1852.73,149.19 1904.81,149.19 1950,104 2015,104 2047.44,136.44 R25.2
NetR26_2: R26.2 U5.5 | length 709.8
  Top Layer w8: U5.5 1912,-605 1912,-545.07 1896.71,-529.78 1821.51,-529.78 1811.73,-520 1800.78,-520 1791.99,-511.21 1791.99,-438.52 1815.29,-415.22 1824.78,-415.22 1846.28,-393.72 1846.28,-357.25 1854.35,-349.19 1897.27,-349.19 1949.55,-296.91 1949.55,-253.91 1955.99,-247.47 2004.48,-247.47 2027.01,-270 R26.2
NEUTRAL: R46.1 R47.1 R48.1 U2.17 | length 3249.4
  Top Layer w8: v1(540,-300) 570.47,-330.47 U2.17 ; v1(1535,-758.53) 1563.53,-730 1580,-730 ; R46.1 1437.78,247.78 1339.47,149.47 1339.47,-115.53 ; R48.1 1580,-730 ; R47.1 1570,-250 1535,-215 1401.82,-215 1358,-171.18 1358,-134.06 1339.47,-115.53 ; 1339.47,-115.53 1338,-117 1338,-308.47 1324.47,-322 1324.47,-546.79 1363.21,-585.53 1510.53,-585.53 1580,-655 1580,-730
  Bottom Layer w8: v1(540,-300) 575,-335 575,-433.82 579,-437.82 579,-451.96 688.04,-561 898.18,-561 914,-576.82 914,-599.18 898.18,-615 898.18,-678.18 1040.53,-820.53 1473,-820.53 v1(1535,-758.53)
OC_RESET: Q6.1 R20.1 U2.64 | length 1427.3
  Top Layer w8: R20.1 508,637.56 515.84,645.4 Q6.1 596.32,645.4 676.45,725.53 716.79,725.53 740.53,701.79 740.53,687.16 802.69,625 956.18,625 1034.82,546.37 1034.82,540.18 v1(1075,500) ; U2.64 581.38,161.38 v1(610,190)
  Bottom Layer w8: v1(610,190) 645,225 800,225 v1(1075,500)
OUT1: C13.2 C33.1 P9.1 Q7.3 Q13.4 R28.1 U3.7 | length 2379.2
  Top Layer w8: C33.1@1870,597.44 1870,558.32 1861.46,549.78 1821.51,549.78 1806.99,535.26 1806.99,514.74 1816.99,504.74 1816.99,491.99 1838.98,470 2002.32,470 Q13.4 1972.68,305 R28.1
  Top Layer w50: P9.1@2626.57,265 2725,265 ; P9.1@2626.57,540.59 2725,540.59 ; P9.1@2823.42,265 2725,265 ; P9.1@2823.42,540.59 2725,540.59 ; 2725,265 2725,540.59
  Top Layer w80: Q7.3 2494.45,315.71 2545.16,265 P9.1@2626.57,265
  Bottom Layer w80: P9.1@2626.57,265 2485,265 2440,310 v2(2130,310) ; v2@2030,352.32 v2@2072.32,310 ; v2@2030,352.32 v2(2030,360) v2(2080,360) v2(2130,360) v2(2130,310) ; v2@2030,352.32 v2(2030,310) v2@2072.32,310 ; v2@2072.32,310 v2(2080,310) v2(2130,310)
OUT2: C34.1 C36.2 P10.1 Q8.3 Q10.4 R37.1 U4.7 | length 2212.5
  Top Layer w8: C34.1 1875,95.65 1829.13,49.78 1821.51,49.78 1806.99,35.26 1806.99,-14 1817.99,-25 U4.7 Q10.4@1988.82,-25 ; R37.1 Q10.4@2048.46,-190
  Top Layer w50: P10.1@2626.57,-135 2725,-135 ; P10.1@2626.57,140.59 2723.42,140.59 ; P10.1@2823.42,-135 2725,-135 ; P10.1@2823.42,140.59 2723.42,140.59 ; 2723.42,140.59 2725,139.02 2725,-135
  Top Layer w80: Q8.3 2494.45,-164.29 2523.74,-135 P10.1@2626.57,-135
  Bottom Layer w80: P10.1@2626.57,-135 v2(2120,-135) ; v2(2020,-85) v2(2070,-135) ; v2(2020,-85) v2(2020,-135) v2(2070,-135) ; v2(2020,-85) v2(2070,-85) v2(2120,-85) v2(2120,-135) ; v2(2070,-135) v2(2120,-135)
OUT3: C35.1 C37.2 P11.1 Q9.3 Q11.4 R39.1 U5.7 | length 2367.9
  Top Layer w8: C35.1 1874.17,-377.56 1861.28,-390.44 1861.28,-399.93 1830.99,-430.22 1821.51,-430.22 1806.99,-444.74 1806.99,-505 U5.7 2017.32,-505 Q11.4 ; R39.1 Q11.4@2048.46,-670
  Top Layer w50: Q9.3 2517.28,-644.29 2626.57,-535 2723.42,-535 ; P11.1@2626.57,-259.41 2723.42,-259.41 ; P11.1@2823.42,-535 2723.42,-535 ; P11.1@2823.42,-259.41 2723.42,-259.41 ; 2723.42,-535 2723.42,-398.78 2723.42,-259.41
  Top Layer w80: P11.1@2723.42,-398.78 P11.1@2725,-397.2
  Bottom Layer w80: v2(2020,-510) v2(2020,-560) v2(2070,-560) v2(2120,-560) v2@2120,-515.35 ; P11.1@2626.57,-535 2139.65,-535 v2@2120,-515.35 ; v2@2120,-515.35 2117.32,-512.68 2025,-512.68 2027.68,-510 v2(2070,-510) v2(2120,-510) v2@2120,-515.35
RST_TGTMCU: C21.2 P2.10 R43.1 U2.34 | length 1572.2
  Top Layer w8: P2.10 136.57,612.44 R43.1 C21.2 ; v1(815,-145) 815,-191.18 861.77,-237.95 U2.34
  Bottom Layer w8: P2.10 89.01,624.17 588,125.18 588,-109 624,-145 v1(815,-145)
SWD_DIO_TGTMCU: P2.2 U2.25 | length 1176.8
  Top Layer w8: U2.25 v1(738.86,-101.5)
  Bottom Layer w8: P2.2 289.01,466.6 625.8,129.81 625.8,11.55 v1(738.86,-101.5)
U_N: D2.1 R2.1 USB_1.2 | length 283.6
  Top Layer w8: R2.1 69.01,-237.31 71.61,-239.9 D2.1 71.61,-400.93 79,-408.32 USB_1.2
U_P: D2.2 R4.1 USB_1.3 | length 295.6
  Top Layer w8: USB_1.3 110,-437.35 146.42,-400.93 D2.2 146.42,-239.9 149.01,-237.31 R4.1
USB_MCU_N: R2.2 U2.6 | length 575.6
  Top Layer w8: R2.2 100.01,-131.44 100.01,-87.54 150.56,-37 180,-37 200,-17 v1(200,-15) ; v1(320,-85) 320.43,-85 344.64,-60.79 U2.6
  Bottom Layer w8: v1(200,-15) 212,-27 212,-42.46 242.54,-73 308,-73 v1(320,-85)
USB_MCU_P: R4.2 U2.5 | length 555.2
  Top Layer w8: R4.2 118.01,-131.44 118.01,-95 158.01,-55 202.43,-55 242,-15.43 v1(242,-15) ; v1(320,-43) 321.9,-41.1 U2.5
  Bottom Layer w8: v1(242,-15) 230,-27 230,-35 250,-55 308,-55 v1(320,-43)
VBAT: C8.2 C28.1 D3.3 D5.1 P1.2 Q2.2 Q5.3 R1.1 R5.1 R9.1 V1.1 | length 4540.6
  Top Layer w8: D5.1 -452.24,0 ; -462.43,151.25 -452.24,151.25 ; R1.1@-110.54,206 R1.1@-104.08,212.46 ; R1.1@-106.54,210 R1.1@-104.08,212.46 ; R1.1@-100.99,200 R1.1@-100.99,214.84 ; v1(10,230) 5.83,225.83 R1.1 ; R5.1@11.46,328 R5.1 6.46,325 -60,325 -100,285 R1.1@-100,225.83 ; D3.3 827,444.49 867,404.49 R9.1 881.46,437 902.75,458.3 Q2.2 ; v1(850,492.6) Q2.2 ; v1(931,461) 920,472 920,492.6 Q2.2 ; R1.1@-104.08,212.46 -103.36,212.46 R1.1@-100.99,214.84 ; R1.1@-104.08,212.46 R1.1@-100.99,215.56 ; R1.1@-100.99,214.84 R1.1@-100.99,215.56 ; R1.1@-100.99,214.84 R1.1 ; R1.1@-100.99,215.56 -100.99,225.83 R1.1@-100,225.83 ; R1.1@-100.99,215.56 R1.1@-90.72,225.83 ; R1.1@-100,225.83 R1.1@-90.72,225.83 ; R1.1@-90.72,225.83 R1.1
  Top Layer w20: Q5.3 -381.07,-400.71 -352.24,-429.53 C8.2
  Top Layer w50: v1(-470,-440) -470,-401.42 v1(-469.29,-400.71) Q5.3 V1.1 -400.75,-173.18 -433.49,-173.18 -452.24,-154.44 -452.24,0 -452.24,151.25 -444.95,158.54 -142.45,158.54 R1.1@-100.99,200
  Bottom Layer w8: v1(10,230) -50,230 -178.58,358.58 -178.58,568.46 -150.04,597 -127,597 -15,709 -15,755 17,787 314,787 429.79,671.21 429.79,625.26 703.79,625.26 741,662.47 741,686 780.53,725.53 822.47,725.53 850,698 v1(850,492.6) ; v1(931,461) 963,461 1000,498 P1.2
  Bottom Layer w50: v1(-470,-440) -470,-400 v1(-469.29,-400.71) -469.29,-453.94 -391.97,-531.26 C28.1
VIN: C7.2 P3.1 Q5.4 | length 1483.2
  Top Layer w8: P3.1@-582.09,-275 -603.15,-275 -598.62,-279.53 C7.2
  Top Layer w50: P3.1@-800,-550.59 P3.1@-640,-550.59 ; P3.1@-603.15,-275 -622.83,-275 -701.57,-353.74 -701.57,-412.8 -701.57,-471.85 -640,-533.43 P3.1@-640,-550.59 ; Q5.4 -501.06,-652.68 -603.15,-550.59 P3.1@-640,-550.59
  Bottom Layer w8: P3.1@-800,-550.59 -800,-275 P3.1@-603.15,-275
VP1: C11.1 C14.2 C15.2 C29.1 C30.1 C32.2 D1.1 D7.3 D8.3 D9.3 P1.1 Q1.4 Q7.4 Q8.4 Q9.4 U3.4 U4.4 U5.4 | length 8933.5
  Top Layer w8: Q1.4 -310,498 -320.99,498 Q1.4@-320.99,555 ; v1(-290.99,715) -305.99,715 -310,710.99 -320.99,700 Q1.4@-320.99,555 ; 490,747.31 519.37,776.69 ; P1.1 1008.31,776.69 1008,777 -98.99,777 -99.3,776.69 -310,565.99 Q1.4@-320.99,555 ; 1597.33,507.67 1605.22,499.78 1688.49,499.78 1720,468.27 1720,370 ; U5.4 1692.01,-605 1699,-611.99 ; U3.4 1650.67,347.13 1630.81,327.27 1630.81,225.5 1637.25,219.06 1644.94,219.06 1690.71,173.29 D9.3 1690.71,129.13 1637.27,75.69 1635.69,75.69 1598.33,38.33 1598.33,11.67 1610.22,-0.22 1688.49,-0.22 1703.01,-14.74 1703.01,-85.52 1702.76,-85.77 1702.76,-125 ; U3.4@1660.67,370 1720,370 ; C14.2 1720,307.44 1720,370 ; C32.2 1702,-670 1699,-667 1699,-611.99 ; C15.2 1727.44,-149.69 1702.76,-125 ; 2328.31,776.69 2375.51,776.69 ; 1699,-611.99 1703.01,-607.98 1703.01,-494.74 1688.05,-479.78 1612.85,-479.78 1598.33,-465.26 1598.33,-444.74 1653.07,-390 1662.52,-390 1690.71,-361.81 D8.3 1690.71,-327.17 1635.81,-272.27 1635.81,-161.28 1650.67,-146.43 U4.4 1702.76,-125
  Top Layer w10: 1597.33,507.67 1597.33,535.68 1612.43,550.78 1633.77,550.78 v1(1662.99,580) 1690.71,607.71 D7.3 ; 2385,720 2385,755 2410,780 D1.1
  Top Layer w50: v3(1720,720) 1720,736.69 1760,776.69 v3(1760,720) v3(1720,720)
  Top Layer w80: Q1.4 -310,565.99 Q1.4@-310,626.69 ; -310,710.99 Q1.4@-310,626.69 ; v1@-305.99,715 -244.3,776.69 -160,776.69 ; P1.1@1110,710 1043.31,776.69 ; Q9.4 Q8.4 Q7.4 2385,720 2328.31,776.69 1760,776.69 1043.31,776.69 ; Q1.4@-310,626.69 -160,776.69 ; -160,776.69 -99.3,776.69 519.37,776.69 1008.31,776.69 1043.31,776.69
  Bottom Layer w10: v1(1662.99,580) 1740,580 C29.1
  Bottom Layer w50: C30.1@-298.49,722.5 v1(-290.99,715) v1(-190,715)
  other v4: 2400,-360 2440,-360
VPUMP: C5.1 C27.2 D4.1 D4.2 P1.3 U1.8 | length 1353.9
  Top Layer w8: U1.8 411,430 431,410 551.09,410 554,407.09 D4.2@564,407.09 ; C27.2 508,505 531.11,481.89 D4.1 D4.2 ; v1(580,349) v1@576,353 ; C5.1 595,314.02 576,333.02 ; 564,365 D4.2@564,407.09 ; 564,365 D4.2@564,407.09 ; 564,365 v1@576,353 ; D4.2@564,407.09 D4.2 ; D4.2 D4.2@576,407.09 ; 576,333.02 v1@576,353 ; 576,333.02 v1@576,353 ; v1@576,353 D4.2@576,407.09 ; v1@576,353 D4.2@576,407.09
  Bottom Layer w8: v1(580,349) 776,349 877,450 877,662 P1.3
pads on no net: D7.2 D8.2 D9.2 P2.6 P2.7 P2.8 P2.9 U2.2 U2.9 U2.10 U2.11 U2.12 U2.19 U2.20 U2.21 U2.23 U2.24 U2.26 U2.27 U2.28 U2.29 U2.50 U2.55 U2.56 U2.61 U2.62 USB_1. USB_1.4

## Polygon pours and split planes (outlines as drawn)
GND on Top Layer "Bottom Layer-No Net" (solid, remove dead copper, pour order 12): -1225,1000 -1200,1025 3250,1025 3250,-925 3050,-1125 2975,-1050 -1200,-1050
GND on Bottom Layer "Bottom Layer-No Net" (solid, remove dead copper, pour order 14): -1475,975 3150,975 3250,1075 3125,950 3125,-1275 -1200,-1275 -1300,-1175

## Keep-outs
Keep-Out Layer:
  lines w10: 2900,-750 2900,750 ccw(c2800.02,750) 2800.02,850 2614.5,850 -236.49,850 -790.5,850 ccw(c-790.5,750) -890.5,750 -890.5,-750 ccw(c-790.5,-750) -790.5,-850 2614.5,-850 2800.34,-850 ccw(c2800.34,-750) 2900.34,-750

## Silkscreen, mask and mechanical layers (free items; w line width, h text height)
Top Overlay:
  lines w10: -690,-60 -640,-60 ; -675,-75 -675,-45 ; 2565,785 2615,785 ; 2600,770 2600,800 ; -670,-60 -655,-45 -655,-75 -670,-60 ; 2580,770 2595,785 2580,800 2580,770
  text "Nathan Zimmerman" at -600,800 h40
  text "SWD Program" at 75,775 h40
  text "PWR" at 2330,770 h40
  text "Cristinel Ababei" at -600,750 h40
  text "Rev 0.2" at -300,750 h40
  text "20A ESC EVAL BOARD" at 1180,750 h80
  text "GND" at 660,745 h40
  text "3.3V" at 770,745 h40
  text "PUMP" at 860,745 h40
  text "BAT" at 980,745 h40
  text "VP1" at 1070,745 h40
  text "GND" at -125,725 h40
  text "Low Sides" at 1990,721.22 h40
  text "1L" at 1170,615 h40
  text "1H" at 1170,515 h40
  text "1A" at 1170,415 h40
  text "1" at 2843.42,395 h40
  text "GND" at -750,175 h40
  text "2L" at 1170,115 h40
  text "2H" at 1170,15 h40
  text "2" at 2848.42,-10 h40
  text "2A" at 1170,-85 h40
  text "VCC" at -750,-175 h40
  text "3L" at 1170,-355 h40
  text "3" at 2848.42,-410 h40
  text "3H" at 1170,-455 h40
  text "3A" at 1170,-555 h40
  text "Extern" at 1002.22,-584.35 h40
  text "High Sides" at 2310,-730 h40
Mechanical 3:
  text "ESC Rev 2" at 550,975 h200
  text "Nathan Zimmerman" at -814,-973 h100
  text "Rev 2" at -817,-1051 h100

## Dimensions
-790.5,850 to -790.5,-850 on Mechanical 3
-790.5,-850 to -790.5,850 on Mechanical 3

## Text inside footprints (layer, text, board x,y; h text height)
C11: Bottom Overlay "+" at 2492.6,-265.51 h60 r270
C28: Bottom Overlay "+" at -205.51,-572.6 h60 r180
C29: Bottom Overlay "+" at 1645.51,712.6 h60
C30: Bottom Overlay "+" at -394.49,712.6 h60